# Altium PCB плата фотодетектора.PcbDoc
Units mm, origin at the board's own origin, x right, y up, seen from the top; angles counter-clockwise.
Board outline 50 x 50 mm, 4 copper layers (Top Layer, Inner 1, Inner 2, Bottom Layer), stack 0.778 mm thick; 82 components, 57 nets, 282 pads, 48 vias.
Unrouted connection lines stored in the file: 27.
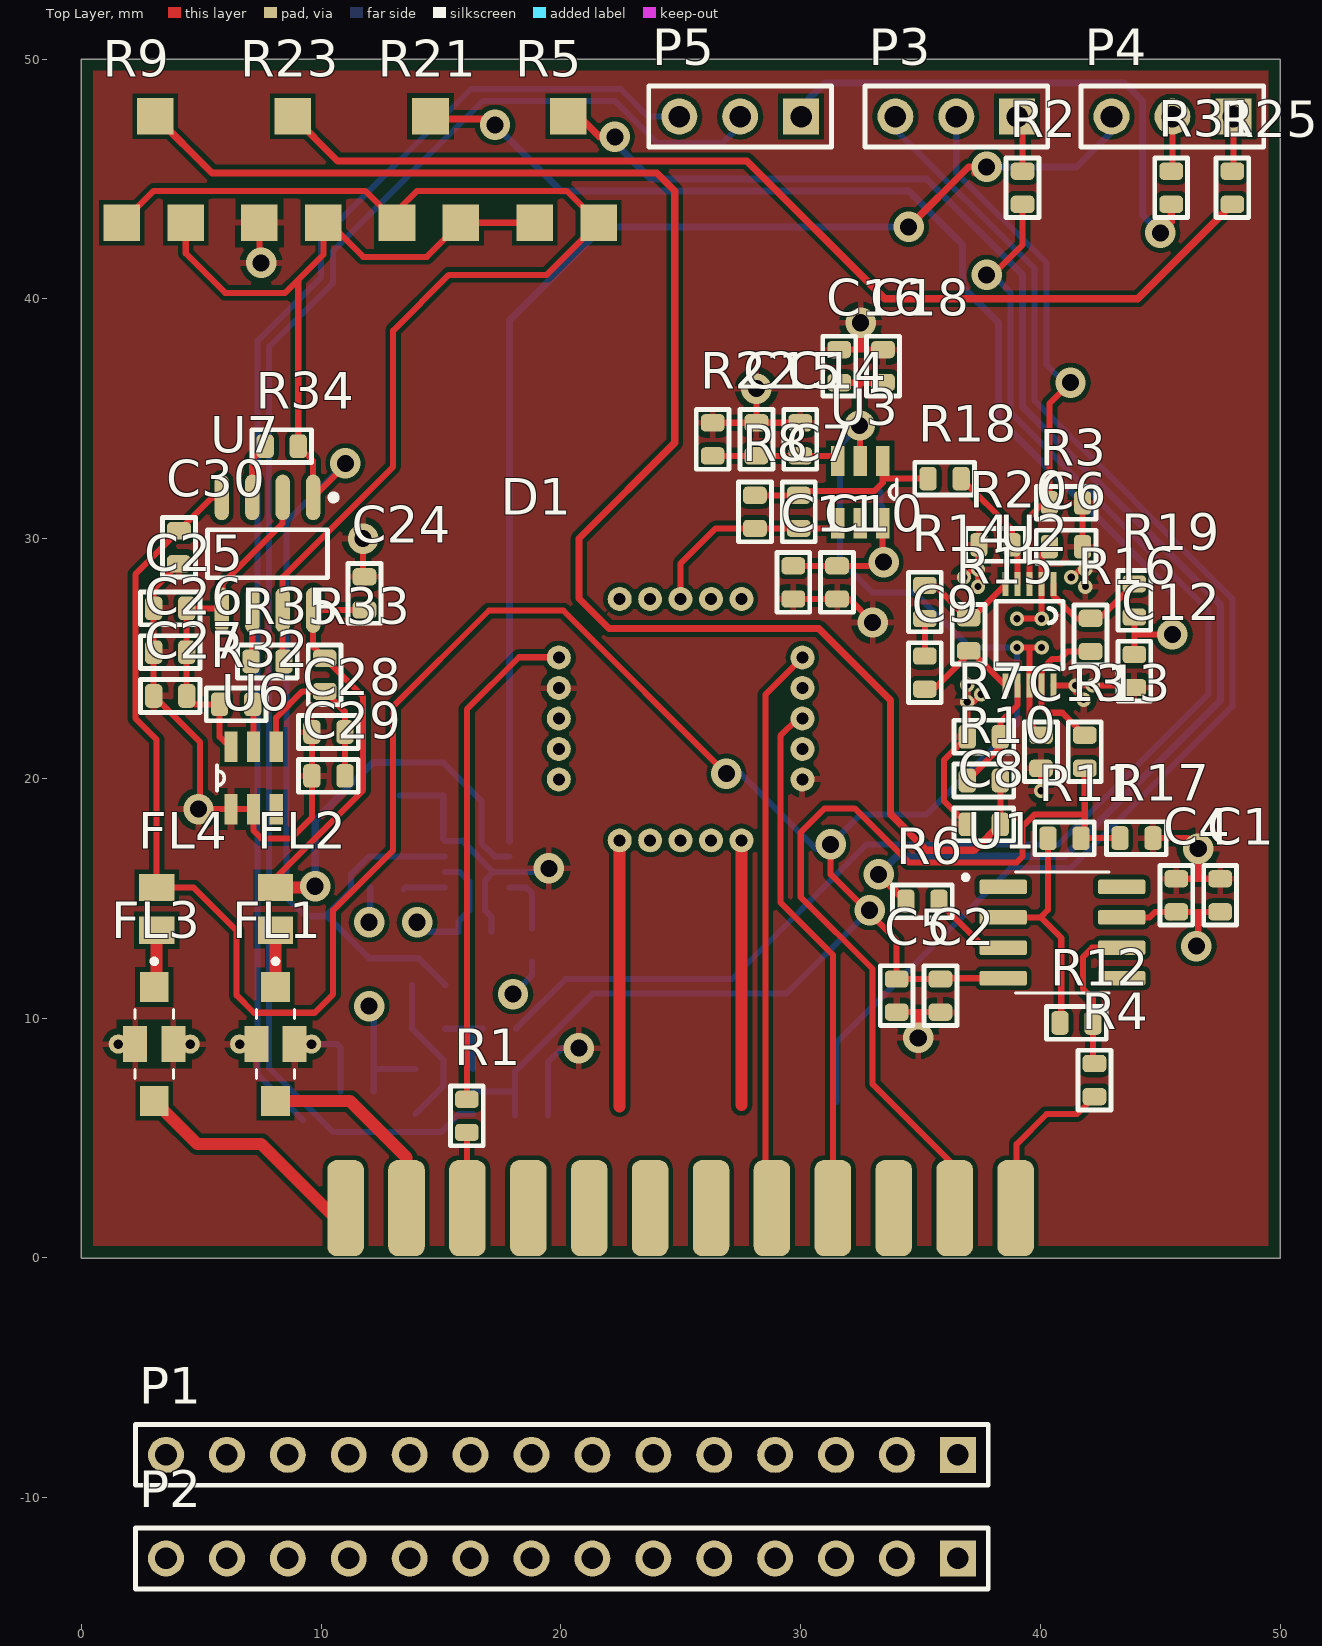
[diagram p0: Top Layer view]
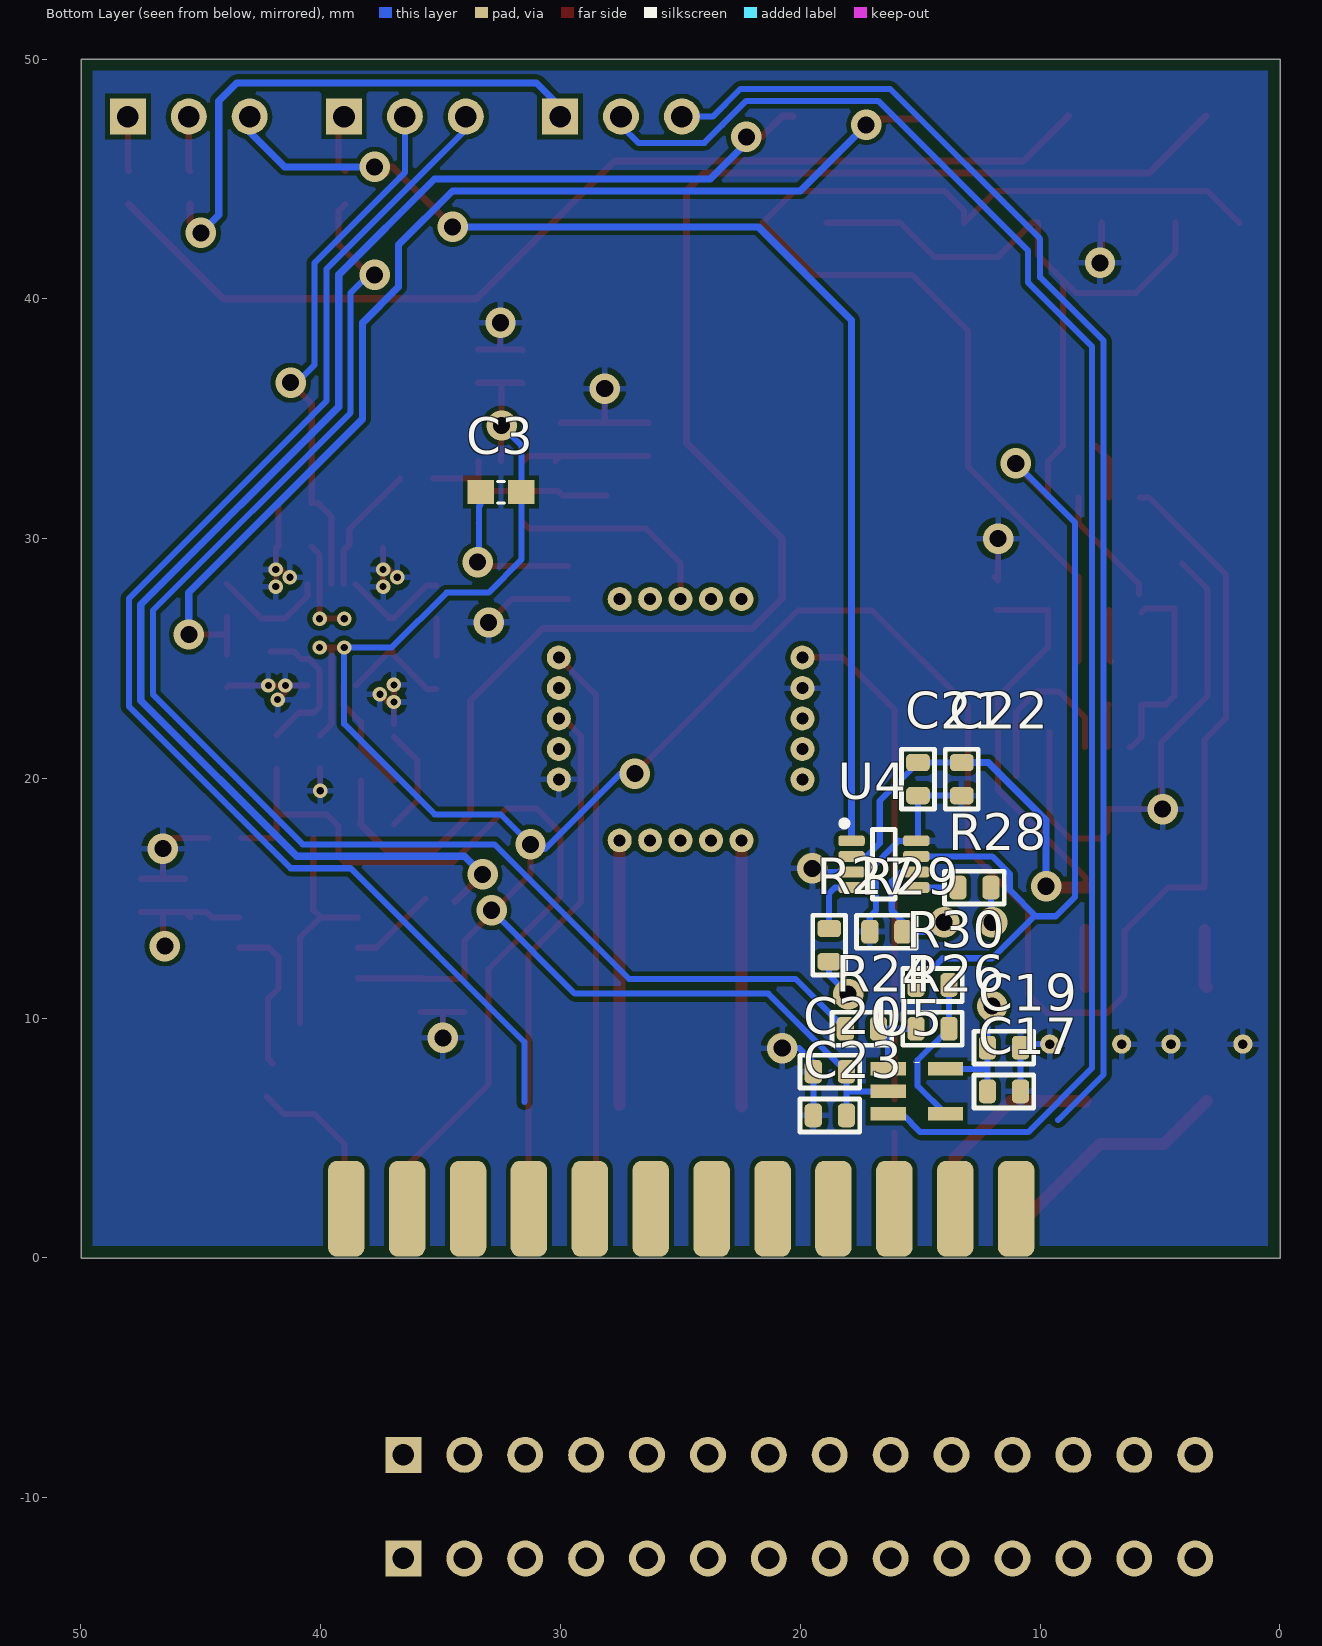
[diagram p1: Bottom Layer view, seen from below]
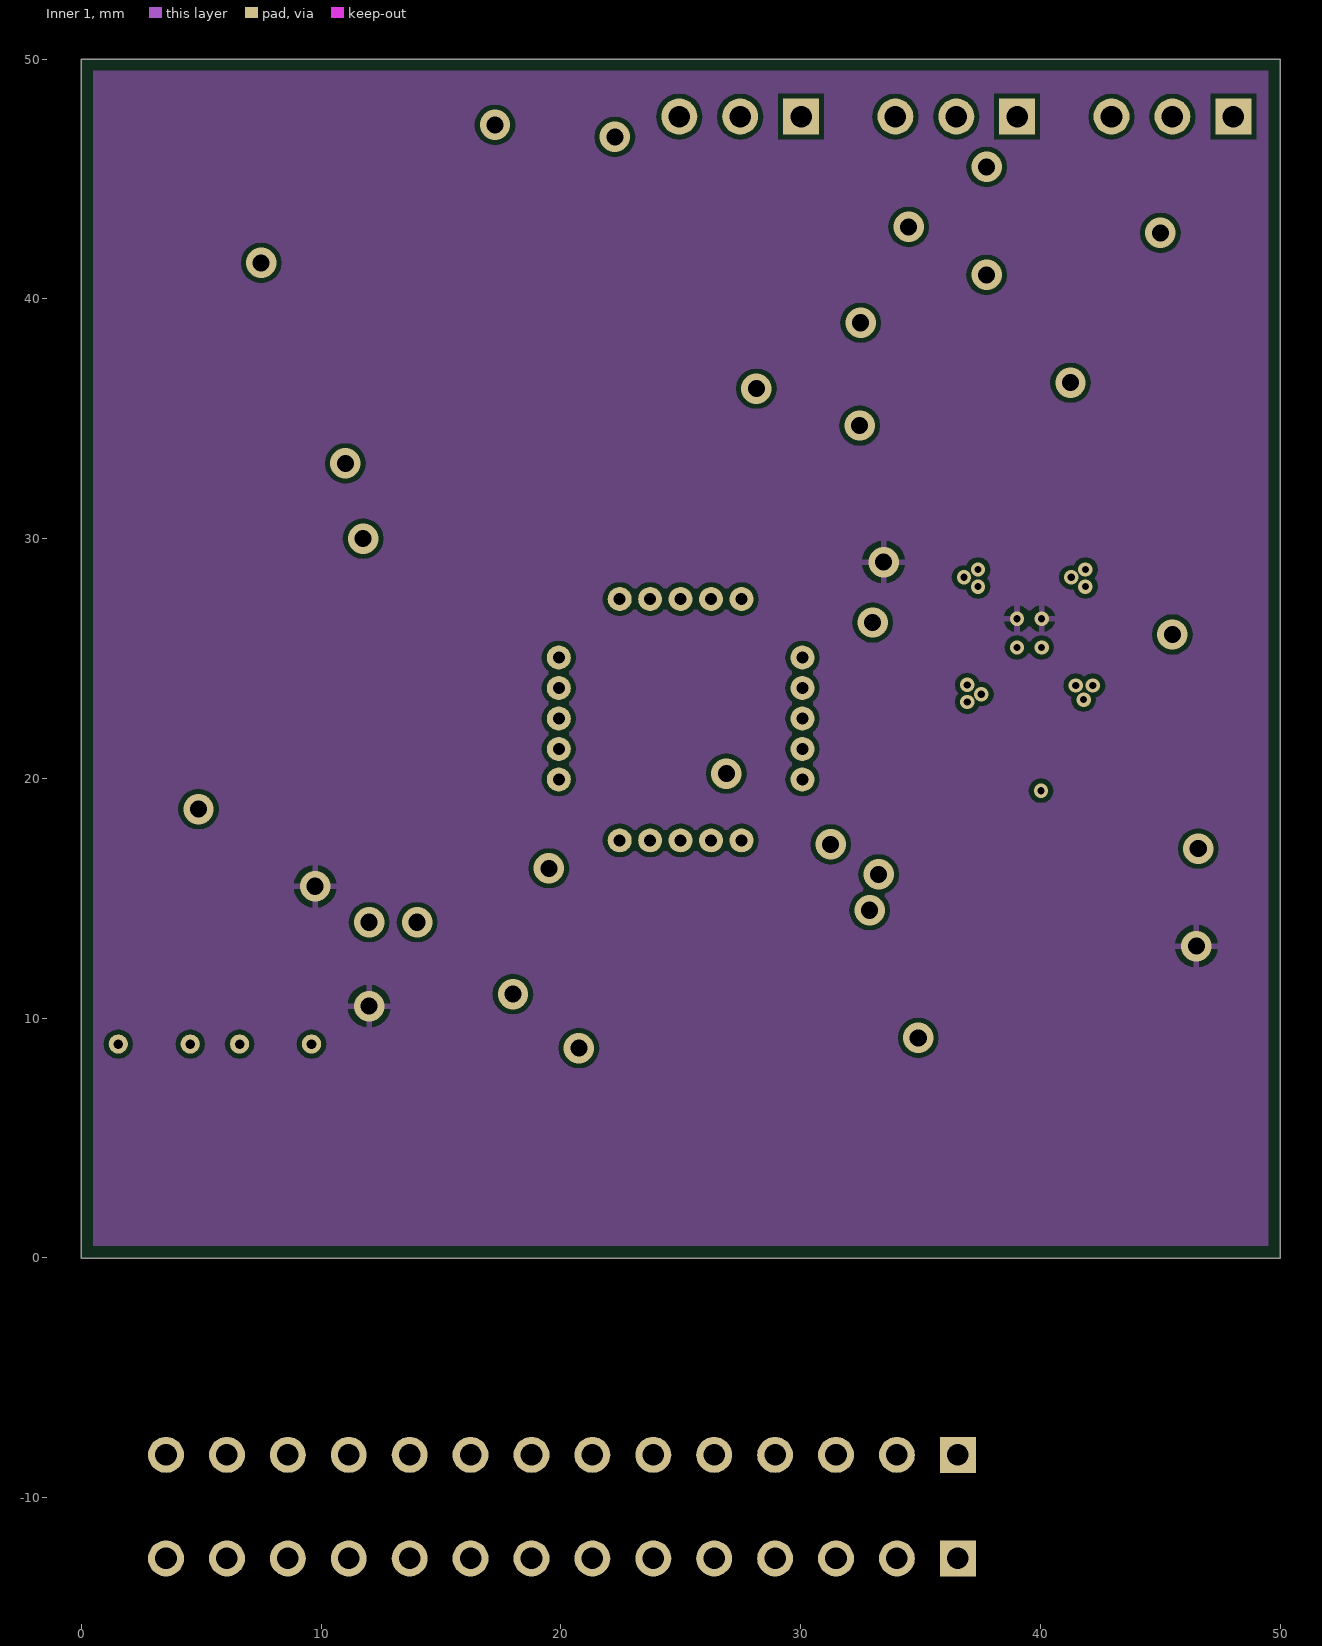
[diagram p2: Inner 1]
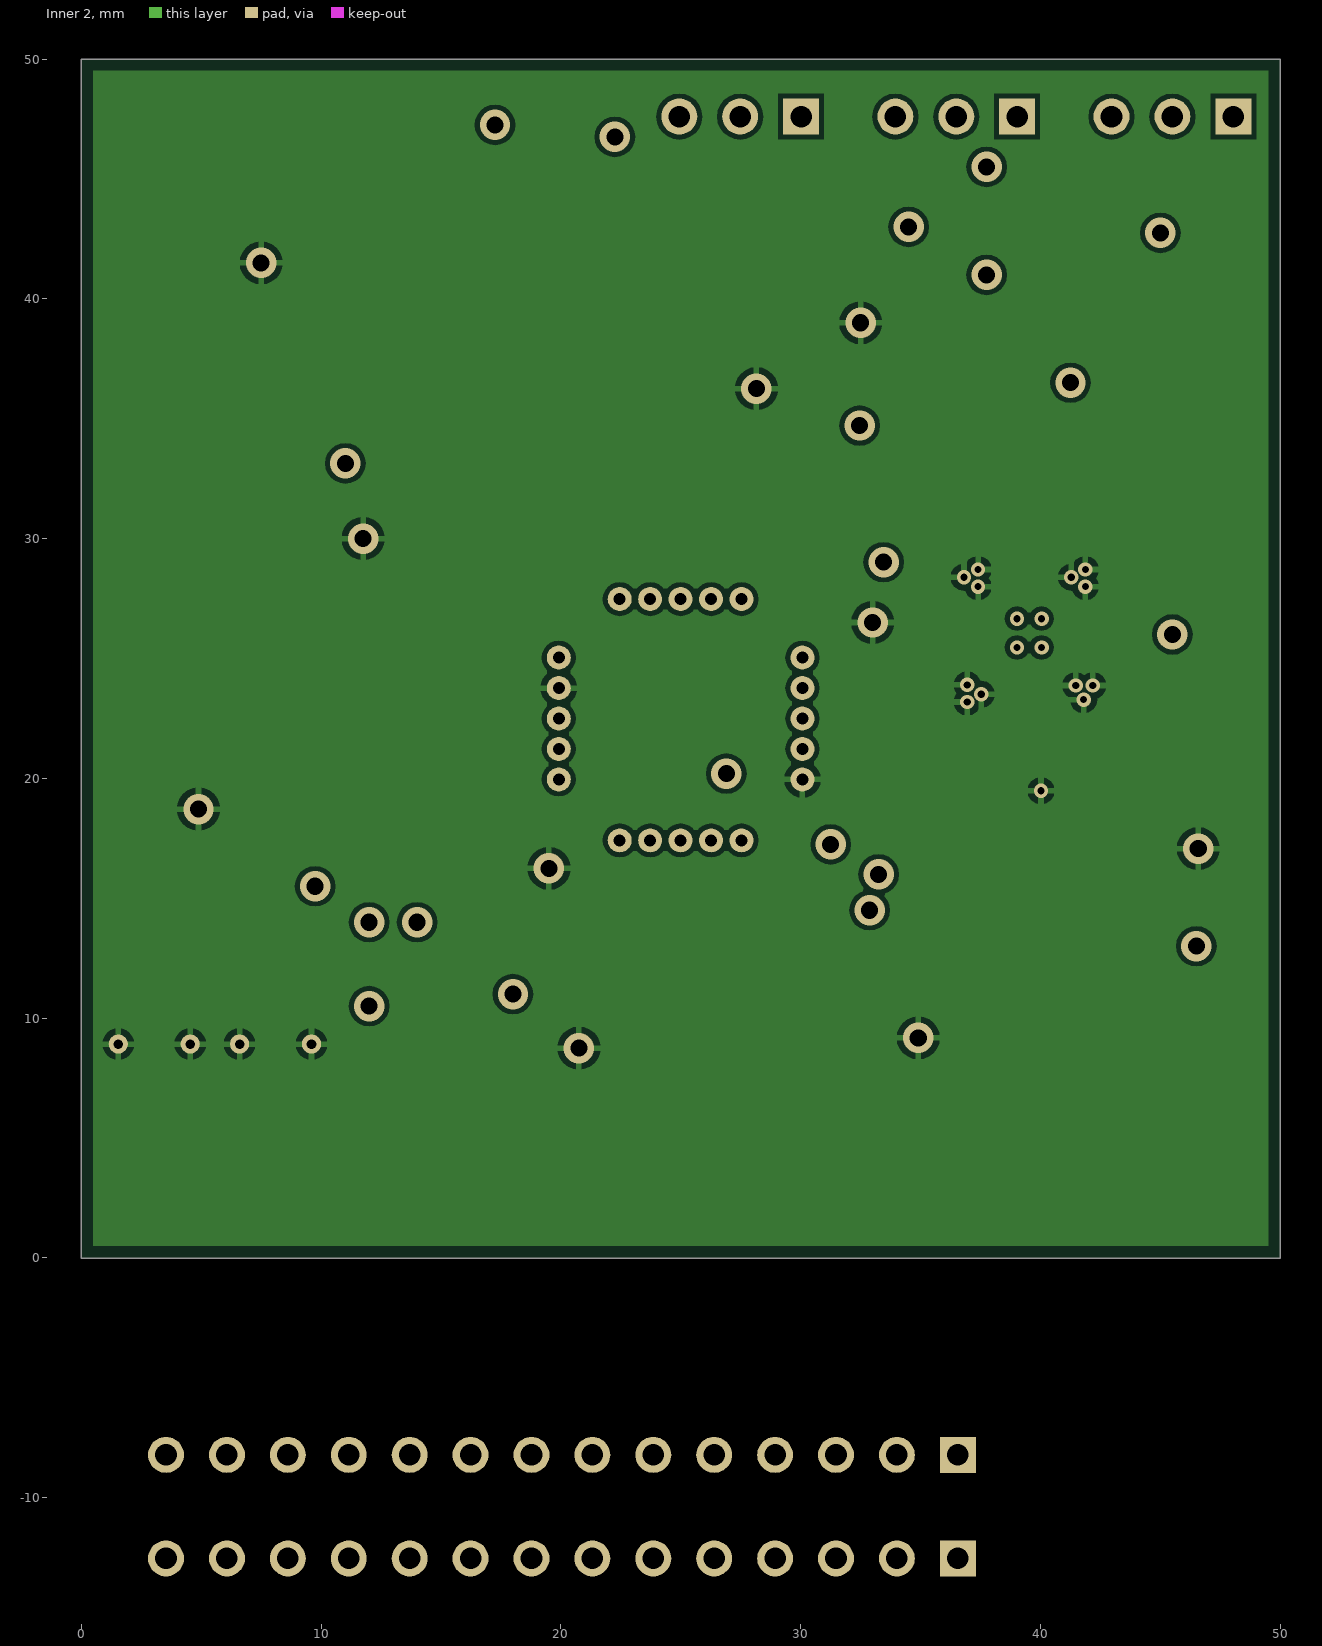
[diagram p3: Inner 2]
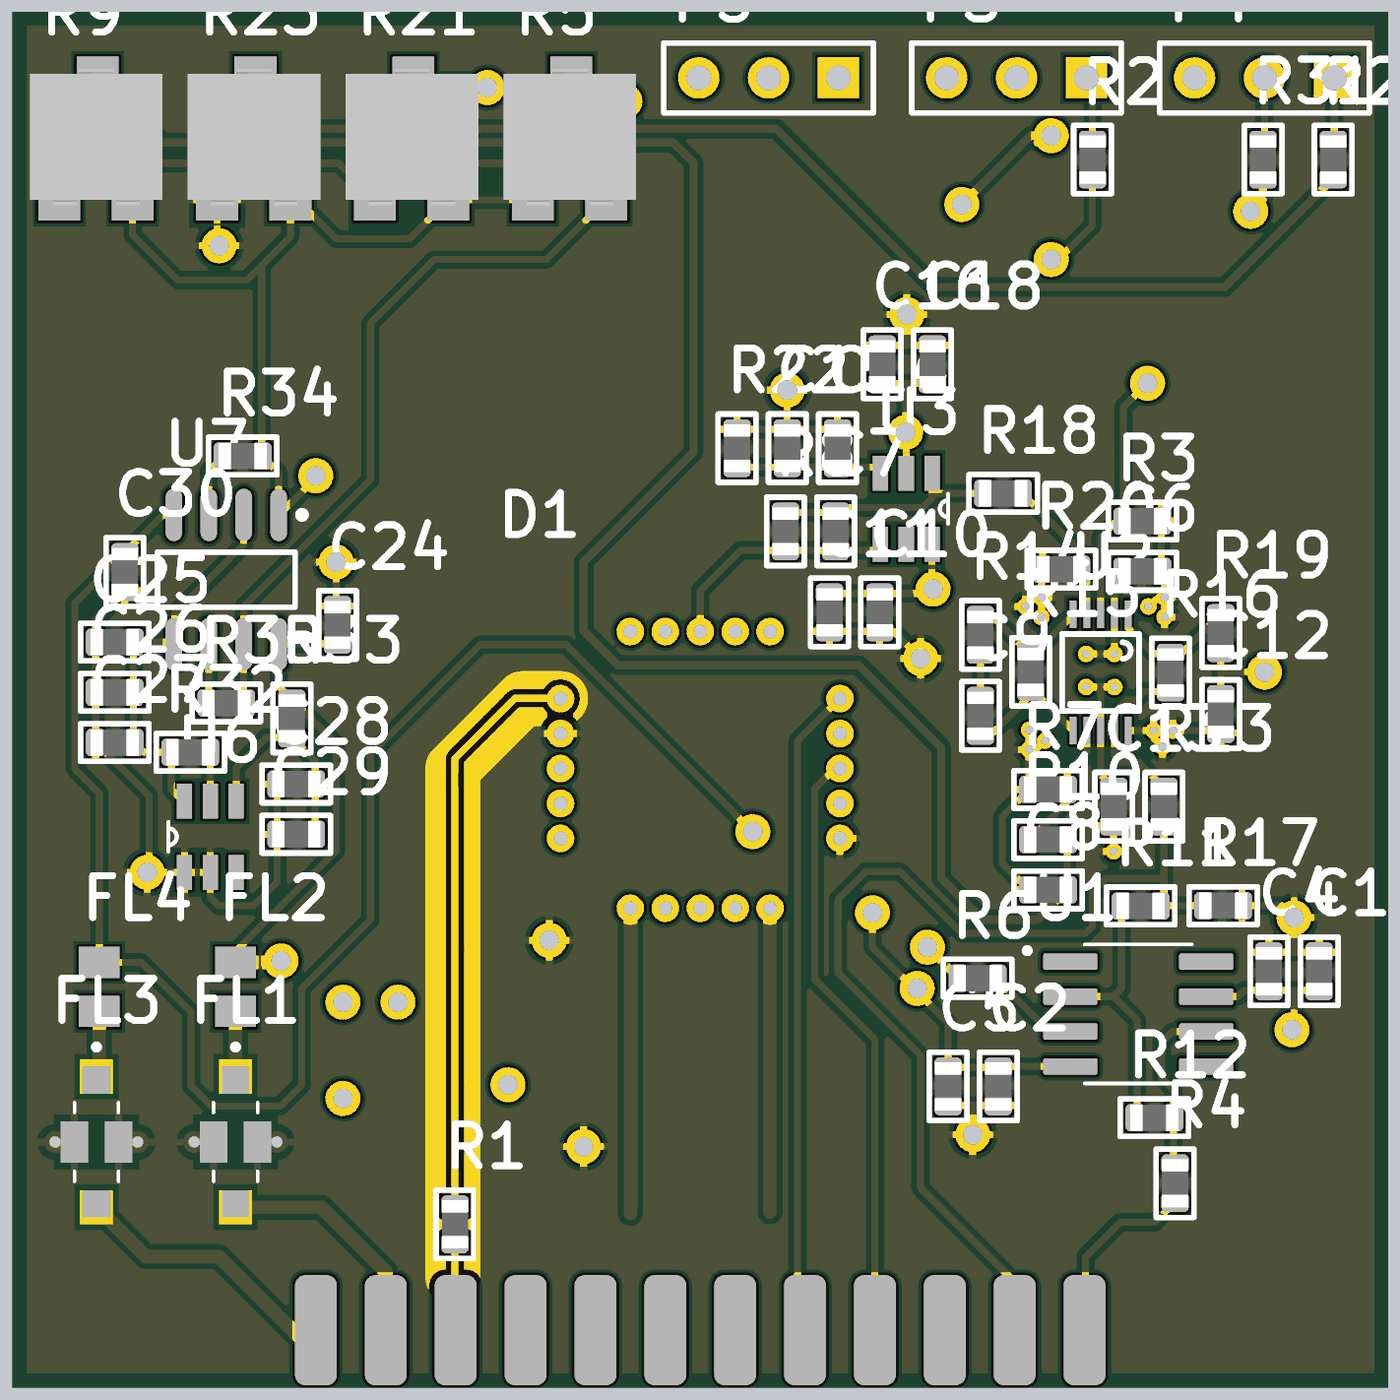
[diagram p4: 3D render of the assembled board from above, using the file's embedded part models]
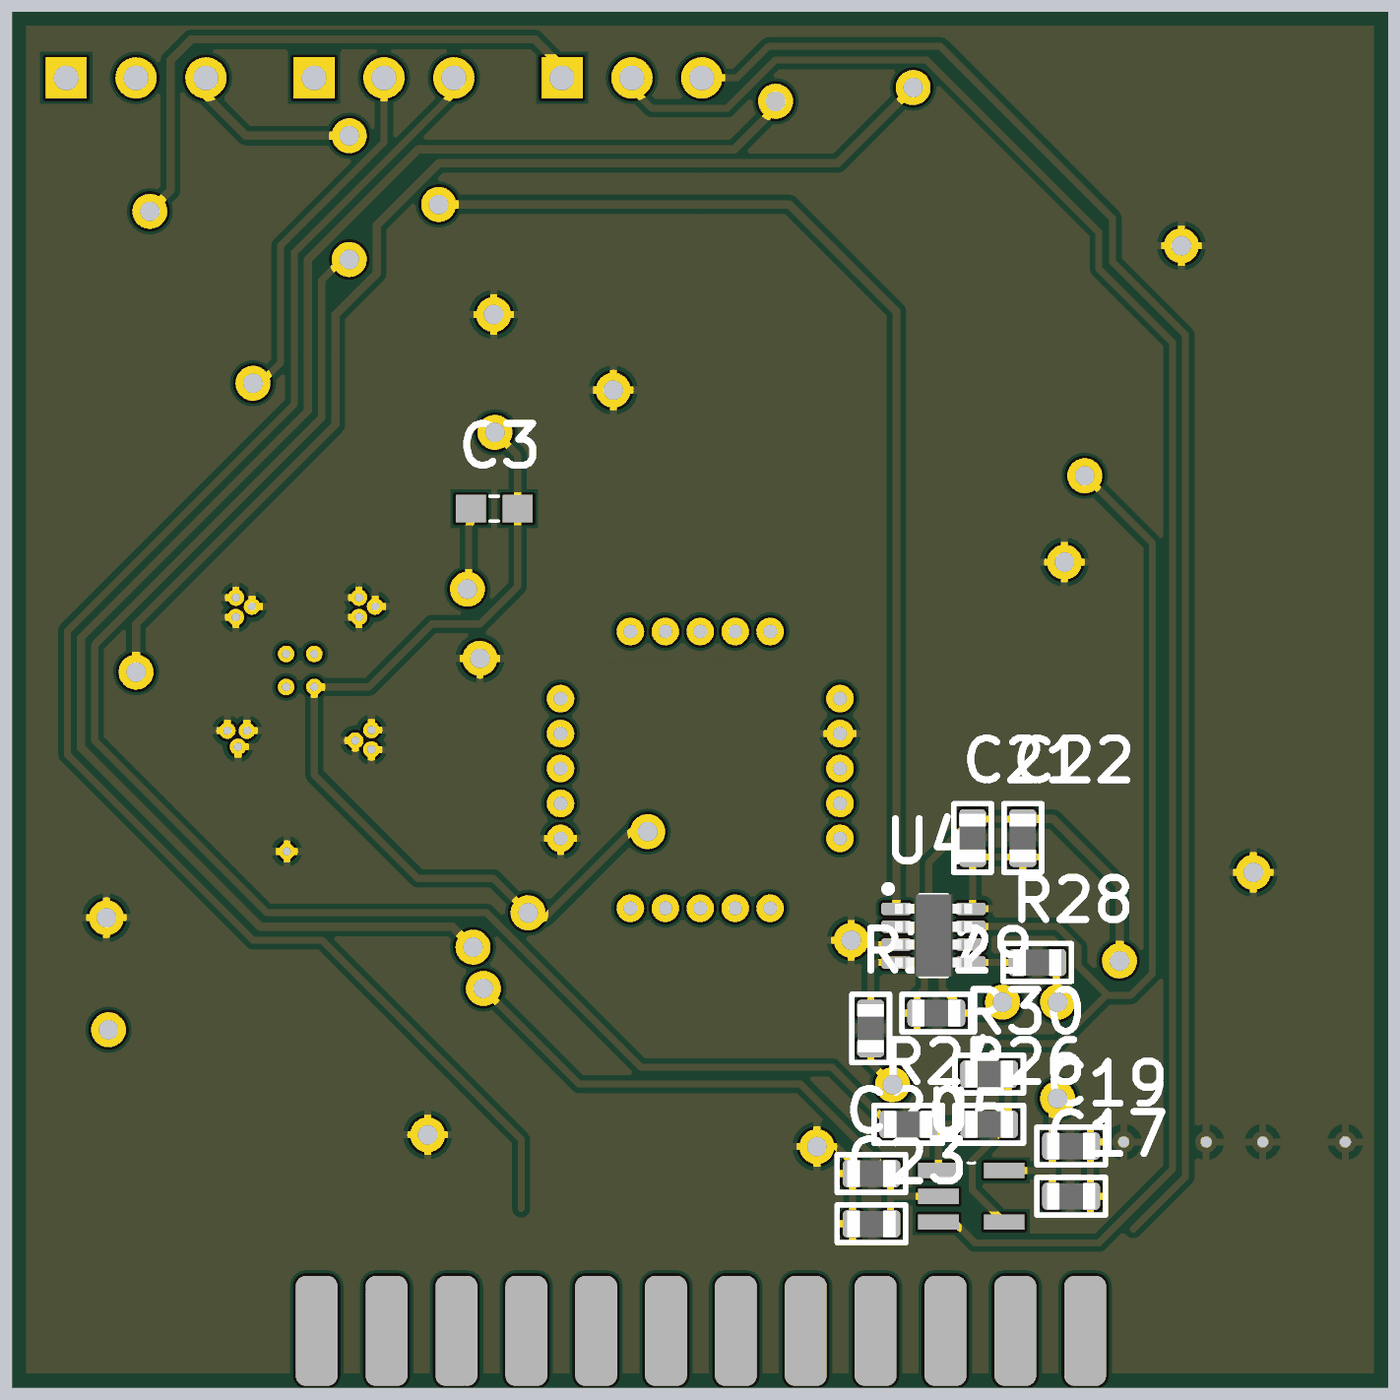
[diagram p5: 3D render of the assembled board from below, using the file's embedded part models]

## Layer stack, top to bottom
Top Solder: solder mask 0.0102, Solder Resist, Dk 3.5
Top Layer: signal copper 0.0356
Dielectric 1: core 0.254, FR-4, Dk 4.2
Inner 1: signal copper 0.036
Dielectric 3: prepreg 0.127, Dk 4.2
Inner 2: signal copper 0.036
Dielectric 2: core 0.254, Dk 4.2
Bottom Layer: signal copper 0.0356
Bottom Solder: solder mask 0.0102, Solder Resist, Dk 3.5

## Board outline
-0.01,-0.005 49.99,-0.005 49.99,49.995 -0.01,49.995

## Design rules (kind name [scope] priority, off if disabled: settings)
Clearance [All] p1: gap=0.2
PolygonConnect [All] p1: connectstyle=Relief reliefconductorwidth=0.254 reliefentries=4 polygonreliefangle="90 Angle" airgapwidth=0.254
RoutingVias [All] p1: holewidth=0.711 width=1.27 viastyle="Through Hole" minholewidth=0.711 minwidth=1.27 maxholewidth=0.711 maxwidth=1.27
SolderMaskExpansion [All] p1: expansion=0.102
Width [All] p1: maxlimit=254 minlimit=0.254 preferedwidth=0.254
30 further rules are at their usual default settings.

## Components (designator, comment, footprint, x,y, rotation, side; value= is the part's Value field where it differs from the comment)
C1 "6,8uF" 0603 47.49,15.124 r90 top
C2 "6,8uF" 0603 35.826,10.94 r90 top
C3 "CX0603MRX7R6BB104" CAPC1608X90 32.48,31.94 r0 bottom
C4 "0,1uF" 0603 45.664,15.124 r90 top
C5 "o,1uF" 0603 34,10.94 r90 top
C6 "2,2u" 0603 41.063,29.664 r0 top
C7 "0.5p" 0603 29.916,31.115 r270 top
C8 "100n" 0603 37.635,18.083 r180 top
C9 "15p" 0603 35.177,24.412 r90 top
C10 "6,8uF" 0603 31.516,28.172 r270 top
C11 "100n" 0603 29.69,28.172 r90 top
C12 "100n" 0603 43.913,24.475 r90 top
C13 "2,2u" 0603 40.02,21.11 r90 top
C14 "100n" 0603 29.979,34.14 r270 top
C15 "100p" 0603 28.153,34.14 r90 top
C16 "100n" 0603 31.606,37.19 r270 top
C17 "4,7uF" 0603 11.504,6.945 r0 bottom
C18 "6,6uF" 0603 33.432,37.19 r90 top
C19 "100n" 0603 11.504,8.771 r0 bottom
C20 "100n" 0603 18.766,7.77 r180 bottom
C21 "100n" 0603 15.09,19.969 r90 bottom
C22 "10u" 0603 13.264,19.969 r90 bottom
C23 "4,7uF" 0603 18.766,5.944 r180 bottom
C24 "100n" 0603 11.805,27.715 r270 top
C25 "100n" 0603 3.705,27.09 r0 top
C26 "1u" 0603 3.705,25.264 r0 top
C27 "1u" 0603 3.705,23.438 r0 top
C28 "100n" 0603 10.303,21.931 r0 top
C29 "2,2u" 0603 10.303,20.106 r0 top
C30 "100n" 0603 4.07,29.64 r90 top
D1 "C30956" C30659 24.99,22.495 r0 top
FL1 "NFM41PC155B1E3L" FIL_NFM41PC155B1E3L 8.097,8.92 r270 top
FL2 "BLM18SG700TN1D" BEADC2012X105N 8.097,14.557 r90 top
FL3 "NFM41PC155B1E3L" FIL_NFM41PC155B1E3L 3.04,8.92 r270 top
FL4 "BLM18SG700TN1D" BEADC2012X105N 3.14,14.557 r90 top
P1 "Header 14" HDR1X14 36.551,-8.213 r180 top
P2 "Header 14" HDR1X14 36.551,-12.531 r180 top
P3 "MHDR1X3" HDR1X3 39.028,47.6 r180 top
P4 "MHDR1X3" HDR1X3 48.04,47.6 r180 top
P5 "Header 3" HDR1X3 30.015,47.6 r180 top
R1 "CHV1206" 0603 16.075,5.925 r90 top
R2 "1k" 0603 39.25,44.631 r270 top
R3 "50" 0603 41.063,31.49 r0 top
R4 "50" 0603 42.25,7.418 r270 top
R5 "10k" respotBourns 16.87,42.535 r0 top
R6 "20k" 0603 35.076,14.873 r0 top
R7 "50" 0603 37.635,21.735 r180 top
R8 "10k" 0603 28.09,31.115 r90 top
R9 "10k" respotBourns -0.345,42.535 r0 top
R10 "1k" 0603 37.635,19.909 r180 top
R11 "400" 0603 41,17.5 r180 top
R12 "400" 0603 41.5,9.802 r0 top
R13 "50" 0603 41.846,21.11 r270 top
R14 "500" 0603 35.177,27.355 r270 top
R15 "500" 0603 37.003,26.01 r270 top
R16 "500" 0603 42.087,25.985 r270 top
R17 "50" 0603 44,17.509 r180 top
R18 "50" 0603 36,32.5 r0 top
R19 "4k" 0603 43.913,27.419 r90 top
R20 "50" 0603 38.12,29.74 r0 top
R21 "10k" respotBourns 11.132,42.535 r0 top
R22 "10k" 0603 26.327,34.14 r90 top
R23 "10k" respotBourns 5.394,42.535 r0 top
R24 "50" 0603 17.428,9.56 r0 bottom
R25 "1k" 0603 48,44.631 r270 top
R26 "10k" 0603 14.485,9.56 r0 bottom
R27 "50-300" 0603 18.795,13.046 r270 bottom
R28 "50-300" 0603 12.736,15.445 r180 bottom
R29 "5k" 0603 16.41,13.605 r180 bottom
R30 "10k" 0603 14.485,11.386 r180 bottom
R31 "10k" 0603 45.45,44.631 r90 top
R32 "1k" 0603 6.455,23.087 r180 top
R33 "1kom" 0603 10.145,24.316 r90 top
R34 "1kom" 0603 8.355,33.855 r180 top
R35 "1kom" 0603 7.76,24.875 r180 top
U1 "OPA656U" SOIC127P599X175-8N 40.915,13.57 r0 top
U2 "VCA824" MSOP10 39.545,25.985 r180 top
U3 "OPA847IDBVT" *SOT95P280X145-6N 32.48,31.94 r270 top
U4 "CAT5172" SOT238 16.51,16.42 r180 bottom
U5 "AD8065ART-R2" SOT95P290X145-5N 15.135,6.945 r180 bottom
U6 "REF3225AMDBVREPG4" SOT95P280X145-6N 7.18,20.015 r90 top
U7 "LM2904D" SO8_L 7.76,29.365 r270 top

## Footprints (in the part's own frame and the unit in brackets; to place one, negate y for a bottom-side part, rotate by r counter-clockwise, add the part's x,y. Pads: shape width x height; smd on the part's side, far side on the other; paste and mask are expansions set on the pad)
0603 [mm]
  rrect50% 0.72x0.99 smd: 1(-0.69,0) 2(0.69,0)
  silkscreen extent -1.24,-0.69 1.24,0.69, body extent -0.87,-0.47 0.88,0.48, height 0.5
*SOT95P280X145-6N [mil]
  rect 50x22 smd: 1(-51,37) 2(-51,0) 3(-51,-37) 4(51,-37) 5(51,0) 6(51,37)
  silkscreen extent -21,48 21,60
BEADC2012X105N [mm]
  rect 1.14x1.47 smd: 1(-0.89,0) 2(0.89,0)
C30659 [mm]
  round 1 hole 0.5 paste+0: 1(-2.54,4.98) 2(0,4.98) 3(2.54,4.98) 4(5.08,2.54) 5(5.08,0) 6(5.08,-2.54) 7(2.54,-5.08) 8(0,-5.08) 9(-2.54,-5.08) 10(-5.08,-2.54) 11(-5.08,0) 12(-5.08,2.54)
  body extent -7.62,-7.62 7.62,7.62, height 5.6
CAPC1608X90 [mm]
  rect 1.1x1 smd: 1(-0.85,0) 2(0.85,0)
  silkscreen extent -0.15,-0.45 0.15,0.45
FIL_NFM41PC155B1E3L [mm]
  rect 1.25x1.2 smd paste-2 mask+0: 1(-2.375,0) 3(2.375,0)
  rect 1.5x1 smd mask+0: 2(0,0.8) 2_1(0,-0.8)
  round 0.8 hole 0.4 mask+0: 2_3(0,1.5) 2_4(0,-1.5)
  silkscreen extent -3.55,-0.8 1.43,0.8
HDR1X3 [mm] "Connector; Header; 3 Position"
  rect 1.5x1.5 hole 0.9: 1(0,0)
  round 1.5 hole 0.9: 2(2.54,0) 3(5.08,0)
  silkscreen extent -1.27,-1.27 6.35,1.27
HDR1X14 [mm] "Connector; Header; 14 Position"
  rect 1.5x1.5 hole 0.9: 1(0,0)
  round 1.5 hole 0.9: 2(2.54,0) 3(5.08,0) 4(7.62,0) 5(10.16,0) 6(12.7,0) 7(15.24,0) 8(17.78,0) 9(20.32,0) 10(22.86,0) 11(25.4,0) 12(27.94,0) 13(30.48,0) 14(33.02,0)
  silkscreen extent -1.27,-1.27 34.29,1.27
MSOP10 [mm]
  rect 0.25x1 smd: 1(-1,-2.113) 2(-0.5,-2.113) 3(0,-2.113) 4(0.5,-2.113) 5(1,-2.113) 6(1,2.113) 7(0.5,2.113) 8(0,2.113) 9(-0.5,2.113) 10(-1,2.113)
  silkscreen extent -1.4,-1.4 1.4,1.4
respotBourns [mil]
  rect 60x60 smd: 1(80,25) 2(135,200) 3(185,25)
  body extent 38,18 228,213, height 147
SO8_L [mm] "SOIC, 8-Leads, Body 4.9x3.9mm, Pitch 1.27mm, IPC High Density"
  oval 1.9x0.6 smd: 1(-2.35,1.905) 2(-2.35,0.635) 3(-2.35,-0.635) 4(-2.35,-1.905) 5(2.35,-1.905) 6(2.35,-0.635) 7(2.35,0.635) 8(2.35,1.905)
  silkscreen extent -2.47,-2.5 1,2.88, body extent -1.95,-2.45 1.95,2.45, height 1.75
SOIC127P599X175-8N [mm]
  rrect25% 1.97x0.6 smd: 1(-2.47,1.905) 2(-2.47,0.635) 3(-2.47,-0.635) 4(-2.47,-1.905) 5(2.47,-1.905) 6(2.47,-0.635) 7(2.47,0.635) 8(2.47,1.905)
  silkscreen extent -4.14,-2.52 1.95,2.52
SOT95P280X145-6N [mil]
  rect 50x22 smd: 1(-51,37) 2(-51,0) 3(-51,-37) 4(51,-37) 5(51,0) 6(51,37)
  silkscreen extent -21,48 21,60
SOT95P290X145-5N [mil]
  rect 58x22 smd: 1(-47,37) 2(-47,0) 3(-47,-37) 4(47,-37) 5(47,37)
  silkscreen extent -5,47 5,48
SOT238 [mm]
  rrect50% 1.1x0.45 smd: 1(-1.35,0.975) 2(-1.35,0.325) 3(-1.35,-0.325) 4(-1.35,-0.975) 5(1.35,-0.975) 6(1.35,-0.325) 7(1.35,0.325) 8(1.35,0.975)
  silkscreen extent -1.78,-1.45 0.48,1.82, body extent -1.4,-1.5 1.4,1.5, height 1

## Part data
C1 C2 C4 C5 C6 C7 C8 C9 C10 C11 C12 C13 C14 C15 C16 C17 C18 C19 C20 C21 C22 C23 C24 C25 C26 C27 C28 C29 C30: library part _capacitor
C3: "0.1AµF A±20% 10V Ceramic Capacitor X7R 0603 (1608 Metric)"
D1: "ADP_Diod"
FL1 FL3: "?s???????µ??N??°N‚??N€ SMD N? ?µ??????N?N‚N?NZ: 1.5 ???s?¤ ?????». 20%. ???????????°?»N??????µ ???°??N€N??¶?µ?????µ: 25Vdc"
FL2 FL4: library part BLM21SP111SN1D, "110 ???? @ 100 ???“N† 1 ?»??????N? N??»?µ??N‚N€?????µN€?µ???°N‡ N„?µN€N€??N‚????N‹?? N??°N€???? 0805 (2012 ???µN‚N€?????°) 5A"
P1 P2: "Header, 14-Pin"
P3 P4 P5: "Header, 3-Pin"
R1 R2 R3 R4 R6 R7 R8 R10 R11 R12 R13 R14 R15 R16 R17 R18 R19 R20 R22 R24 R25 R26 R27 R28 R29 R30 R31 R32 R33 R34 R35: library part _resistor
R5 R9 R21: library part _resistor_pot, "3224J-1-103"
R23: library part _resistor_pot, "3224j-1-103"
U1: "Wideband, Unity Gain Stable FET-Input Operational Amplifier"
U4: "Digital potentiometr 256-position SPI"
U5: "??N????»??N‚?µ?»N? ???±N€?°N‚?????? N???N??·?? ???? ???°??N€N??¶?µ????NZ 1 N†?µ??N? N€?µ?»N?N?-N€?µ?»N?N? SOT-23-5"
U6: "?????µ?»??N‡?µ????N‹?? ??N€????N???N‚ 4 Ppm/Degreesc 100 UA Sot23-6 N??µN€??N? N???N€?°?????? ???°??N€N??¶?µ????N? N‚?????° 6-SOT-23 -55 ???? 125"
U7: "Low-Power Dual Operational Amplifier"

## Free pads (board coordinates)
  rrect50% 1.524x4 smd far side: 2(26.235,2.052) 3(23.695,2.052) 4(21.155,2.052) 5(18.615,2.052) 6(16.075,2.052) 7(13.535,2.052) 8(10.995,2.052) 9(28.775,2.052) 10(31.315,2.052) 11(33.855,2.052) 12(36.395,2.052) 13(38.935,2.052)
  rrect50% 1.524x4 smd: 2(26.26,2.078) 3(23.72,2.078) 4(21.18,2.078) 5(18.64,2.078) 6(16.1,2.078) 7(13.56,2.078) 8(11.02,2.078) 9(28.8,2.078) 10(31.34,2.078) 11(33.88,2.078) 12(36.42,2.078) 13(38.96,2.078)
  round 1 hole 0.5: 14(19.91,21.225) 14(19.91,23.765) 14(23.72,17.415) 14(23.72,27.475) 14(26.26,17.415) 14(26.26,27.475) 14(30.07,21.225) 14(30.07,23.765)

## Via types
v1: diameter 1.27, hole 0.711, Top Layer to Bottom Layer, 31 vias
v2: diameter 0.6, hole 0.3, Top Layer to Bottom Layer, 17 vias

## Nets (pads, with @x,y where several pads share a name; then routed paths per layer and width w, separated by ;. In a path a pad name is that pad's centre, name@x,y a point inside that pad or via, vN(x,y) a via of type N, cw(c..) or ccw(c..) an arc to the next point about the centre after c; other vN are vias at no path point)
+2.5REF: R5.1 R9.3 R21.3 R23.3 R30.1 R34.1 U4.7 U7.1 | length 64.7
  Top Layer w0.254: R9.3 4.354,41.896 6,40.25 8.5,40.25 9,40.75 ; v1(11.013,33.138) 11.013,33.062 U7.1 9.665,33.235 R34.1 9.045,40.705 ; R5.1 R21.3 14.411,41.75 11.75,41.75 10.33,43.17 R23.3 10.093,41.843 9.045,40.795 ; 9,40.75 9.045,40.795 ; 9,40.75 9.045,40.705 ; 9.045,40.705 9.045,40.795
  Bottom Layer w0.254: v1(11.013,33.138) 8.55,30.675 8.55,15.05 9.35,14.25 10.175,14.25 ; U4.7 15.155,16.75 12,16.75 11.25,16 11.25,15.325 10.175,14.25 ; R30.1 14.061,12.5 12,12.5 10.25,14.25 10.175,14.25
+5V: FL1.3 P2.1 P2.2 pad.7@13.56,2.078 | length 8.6
  Top Layer w0.5: FL1.3@8.142,6.5 FL1.3 11.205,6.545 13.56,4.19 pad.7@13.56,2.078
+5V(AN): C1.1 C3.2 C4.1 C6.1 C10.1 C11.2 C17.2 C19.2 C21.2 C22.2 C24.2 FL2.2 P1.12 R33.2 U1.7 U2.2 U3.6 U4.2 U5.5 U7.8 | length 56.4
  Top Layer w0.254: FL2.2 8.097,15.847 11.75,19.5 11.75,23.401 R33.2 9.665,25.486 U7.8 9.675,27.025 C24.2 ; v1@9.697,15.447 v1(9.75,15.5) ; C11.2 C10.1 33.302,28.862 v1(33.455,29.015) 33.79,29.015 33.405,29.4 33.405,30.63 U3.6 ; v2(39.02,26.66) v2(40.045,26.66) ; v2@40.045,26.685 U2.2 40.045,29.335 C6.1 ; U1.7 44.55,14.205 44.779,14.434 C4.1 ; C4.1@45.435,14.205 C4.1 ; v1(46.5,13) 46.577,13.077 46.577,14.434 ; C1.1 46.577,14.434 ; C4.1 46.577,14.434
  Top Layer w0.5: FL2.2 v1@9.697,15.447
  Bottom Layer w0.254: v1(12,10.5) 12.194,10.306 C19.2 12.194,7.92 ; C17.2 12.194,7.92 ; C22.2 C21.2 16.685,19.064 16.685,17.295 17.235,16.745 U4.2 ; U5.5 12.229,7.885 12.194,7.92 ; C3.2 33.33,31.415 33.405,31.34 v1@33.405,29.315
  Bottom Layer w0.3: v1(9.75,15.5) 9.75,18.25 12.159,20.659 C22.2
-2.5REF: R5.3 R9.1 R21.1 R35.1 U7.7 | length 48.5
  Top Layer w0.254: R9.1 3.018,44.5 11.833,44.5 R21.1 13.164,43.664 14,44.5 20.238,44.5 R5.3 19.399,41 15.325,41 13,38.675 13,33 8.395,28.395 U7.7 8.395,24.905 R35.1@8.425,24.875
-5V: FL3.3 P2.4 P2.5 pad.8@11.02,2.078 | length 10.2
  Top Layer w0.5: FL3.3 4.835,4.75 7.5,4.75 pad.8@11,1.25
-5V(AN): C2.2 C3.1 C5.2 C13.2 C16.2 C18.1 C20.2 C23.2 C30.2 FL4.2 U1.4 U2.8 U3.2 U5.2 U7.4 | length 137.6
  Top Layer w0.254: U7.4 5.455,31.715 C30.2 2.25,28.51 2.25,22.5 3.14,21.61 FL4.2 4.678,15.447 6.475,13.65 6.475,10.95 7.2,10.225 9.725,10.225 10.5,11 10.5,14.5 13,17 13,23 17,27 20.1,27 v1(26.9,20.2) ; v1(31.25,17.25) 31.25,16 34,13.25 C5.2 C2.2 C2.2@35.382,11.63 ; C16.2@31.581,36.475 C16.2 C18.1 ; 32.455,36.4 v1(32.455,34.715) 32.48,34.69 U3.2 ; C2.2@35.766,11.665 U1.4 ; v2(39.02,25.46) 39.545,25.46 ; C13.2 39.545,22.275 U2.8 39.545,25.46 ; v2(40.045,25.46) 39.545,25.46
  Bottom Layer w0.254: U5.2 18.051,6.945 18.076,6.97 ; C23.2 18.076,6.97 ; v1(26.9,20.2) 27.5,20.2 30.65,17.05 31.05,17.05 v1(31.25,17.25) 32.5,18.5 35.25,18.5 39.02,22.27 v2(39.02,25.46) 37.04,25.46 34.75,27.75 33,27.75 31.63,29.12 C3.1 31.63,33.89 v1(32.455,34.715) ; v1(32.875,14.5) 29.4,11.025 21.331,11.025 C20.2 18.076,6.97
ANODE_APD: C7.2 D1.2 R8.1 U3.4 | length 8.7
  Top Layer w0.254: D1.2 24.99,28.965 26.45,30.425 R8.1 C7.2 31.321,30.425 U3.4
CATHODE_APD: D1.12 R1.2 | length 21
  Top Layer w0.254: R1.2 16.075,22.875 18.25,25.05 19.895,25.05 D1.12
GND: C1.2 C2.1 C4.2 C5.1 C6.2 C8.2 C10.2 C11.1 C12.1 C13.1 C14.1 C15.2 C16.1 C17.1 C18.2 C19.1 C20.1 C21.1 C22.1 C23.1 C24.1 C25.1 C26.1 C27.1 C28.1 C29.1 C30.1 D1.6 FL1.2 FL1.2_1 FL1.2_3 FL1.2_4 FL3.2 FL3.2_1 FL3.2_3 FL3.2_4 P1.11 P2.3 P2.6 P2.9 P2.12 pad.14@19.91,23.765 R3.2 R7.2 R17.1 R20.1 R22.2 R23.1 R29.1 U2.10 U4.3 U4.8 U6.1 U6.2 | length 82
  Top Layer w0.254: C30.1 3.015,27.895 C25.1 C26.1 C27.1 4.953,21.5 4.953,18.788 v1(4.885,18.72) U6.1 U6.2 7.18,17.82 7.5,17.5 8.75,17.5 9.613,18.363 C29.1 C28.1 ; R23.1 7.426,41.574 v1(7.5,41.5) ; v1(11.75,30) 11.75,28.25 11.905,28.405 C24.1 ; R22.2 C15.2 ; v1@28.25,36.5 28.153,36.403 v1(28.153,36.25) C15.2 ; C11.1 C10.2@31.742,27.482 ; C14.1 C15.2 ; C10.2 32.018,27.482 v1(33,26.5) ; C16.1@31.581,37.855 C16.1 32.519,37.88 ; v1(32.5,39) 32.519,38.981 32.519,37.88 ; C18.2 32.519,37.88 ; C5.1 34.902,10.25 ; v1(34.902,9.179) 34.902,10.25 ; C2.1 34.902,10.25 ; v2(36.808,28.385) 37.133,28.71 v2(37.395,28.71) ; 36.945,22.26 v2(36.945,23.185) ; v2(36.945,23.897) v2(36.945,23.185) ; C8.2 35.97,19.059 35.97,20.76 R7.2 ; v2(37.395,27.998) v2(37.395,28.71) ; R20.1@37.395,29.635 v2(37.395,28.71) ; v2(37.532,23.51) 37.207,23.185 v2(36.945,23.185) ; v2(40.02,19.485) C13.1 ; U2.10 v2(41.47,23.872) ; v2@41.308,28.385 41.633,28.71 v2(41.87,28.71) C6.2@41.87,29.635 ; C6.2 R3.2 ; v2(41.795,23.285) 41.47,23.61 v2(41.47,23.872) ; v2(41.87,27.998) 41.87,28.685 v2@41.895,28.71 ; C12.1 43.826,23.872 v2(42.182,23.872) v2(41.47,23.872) ; R17.1 46.139,17.509 v1(46.577,17.07) 46.577,15.814 ; C4.2 46.577,15.814 ; C1.2 46.577,15.814
  Bottom Layer w0.254: FL1.2_3 10.665,8.92 C19.1 C17.1 ; C22.1 C21.1 15.09,17.465 U4.8 15.885,17.395 ; 15.895,17.405 15.885,17.395 ; R29.1 17.1,14.23 16.835,14.495 16.835,15.745 17.185,16.095 ; C23.1 C20.1 19.456,8.162 20.044,8.75 v1(20.75,8.75) ; v1(19.5,16.25) 19.345,16.095 U4.3 17.185,16.095 ; 15.885,17.395 17.185,16.095
  other v2: 41.283,28.385
INPUT+HV: P2.13 pad.6@16.1,2.078 R1.1 | length 3.2
  Top Layer w0.254: R1.1 16.075,2.103 pad.6@16.1,2.078
NetC7_1: C7.1 R8.2 R18.1 U3.1 | length 8.3
  Top Layer w0.254: R8.2 C7.1 30.091,31.98 33.07,31.98 33.42,32.33 33.42,32.5 ; U3.1 33.42,32.5 ; R18.1 33.42,32.5
NetC8_1: C8.1 R9.2 R10.1 | length 68.6
  Top Layer w0.254: C8.1 R10.1
  Top Layer w0.3: R9.2 5.449,45.25 24,45.25 24.75,44.5 24.75,34 20.75,30 20.75,27.5 22,26.25 30.75,26.25 33.75,23.25 33.75,18.5 35.25,17 37.242,17 C8.1
NetC9_1: C9.1 R15.2 U2.6 | length 4.7
  Top Layer w0.254: C9.1 35.557,23.722 37.003,25.168 R15.2 37.097,25.32 U2.6
NetC9_2: C9.2 R14.2 | length 1.6
  Top Layer w0.254: C9.2 R14.2
NetC12_2: C12.2 R19.1 R21.2 | length 46.8
  Top Layer w0.254: C12.2 43.913,26 ; R19.1 43.913,26 ; v1(45.5,26) 43.913,26
  Top Layer w0.3: R21.2@15.121,47.5 17,47.5 v1(17.25,47.25)
  Bottom Layer w0.3: v1(17.25,47.25) 20,44.5 34.5,44.5 36.75,42.25 36.75,40.5 38.25,39 38.25,35 45.5,27.75 v1(45.5,26)
NetC14_2: C14.2 C15.1 R22.1 U3.3 | length 5.6
  Top Layer w0.254: R22.1 C15.1 C14.2 ; C14.2@30.211,33.219 C14.2 31.326,33.45 U3.3
NetC25_2: C25.2 C26.2 C27.2 R32.2 U6.6 U7.2 U7.5 | length 13.7
  Top Layer w0.254: C25.2@4.39,27.09 4.39,23.444 C27.2 4.746,23.087 R32.2 5.765,21.73 6.185,21.31 U6.6 ; C25.2 5.6,27.09 U7.5@5.765,26.925 ; U7.5@5.88,27.69 5.88,28.115 8.395,30.63 U7.2
NetC28_2: C28.2 C29.2 R33.1 U6.4 | length 7.6
  Top Layer w0.254: U6.4 8.12,22.53 9.216,23.626 R33.1 10.993,22.778 C29.2
NetFL1_1: FL1.1 FL2.1 | length 2.4
  Top Layer w0.5: FL1.1 FL2.1
NetFL3_1: FL3.1 FL4.1 | length 2.4
  Top Layer w0.5: FL3.1 3.14,11.395 FL4.1
NetP3_1: P3.1 R2.1 | length 2.5
  Top Layer w0.254: R2.1@38.975,45.321 39.25,45.596 39.25,47.377 P3.1
NetP3_2: P3.2 R3.1 U2.3 | length 22.5
  Top Layer w0.254: U2.3 39.545,30.91 40.125,31.49 R3.1 40.373,35.623 v1(41.25,36.5)
  Bottom Layer w0.254: P3.2 36.487,45.263 40.25,41.5 40.25,37.25 41,36.5 v1(41.25,36.5)
NetP4_1: P4.1 R25.1 | length 2.3
  Top Layer w0.254: R25.1 48.04,45.361 P4.1
NetP4_2: P4.2 R31.2 | length 2.3
  Top Layer w0.254: R31.2 45.5,45.371 P4.2
NetP4_3: P4.3 U4.1 | length 51.1
  Top Layer w0.3: v1(34.5,43) 37,45.5 v1@37.5,45.5 ; v1@37.25,45.25 v1@37.5,45.5 ; v1(37.75,45.5) v1@37.5,45.5
  Bottom Layer w0.3: U4.1 17.86,39.11 21.75,43 v1(34.5,43) ; v1(37.75,45.5) 41.5,45.5 42.96,46.96 P4.3
NetP5_1: P5.1 R31.1 | length 22.6
  Top Layer w0.3: v1(45,42.75) 45.45,43.2 R31.1
  Bottom Layer w0.3: P5.1 30.015,48.015 31,49 43.5,49 44.25,48.25 44.25,43.5 v1(45,42.75)
NetP5_2: P5.2 U5.3 | length 66.1
  Bottom Layer w0.254: U5.3 15.755,6.005 15,5.25 10.5,5.25 7.825,7.925 7.825,38 10.5,40.675 10.5,42 16.75,48.25 22.25,48.25 23.25,47.25 24,46.5 26.75,46.5 27.475,47.225 P5.2
NetR4_1: R4.1 R12.2 U1.6 | length 6.5
  Top Layer w0.254: R4.1@42,8.108 42.19,8.298 R12.2 42.19,10.81 41.765,11.235 41.765,12.545 42.155,12.935 U1.6
NetR5_2: R5.2 R6.1 | length 61.9
  Top Layer w0.3: R5.2 20.75,47.615 21.615,46.75 v1(22.25,46.75) ; v1(33.25,16) 34.377,14.873 R6.1
  Bottom Layer w0.3: v1(22.25,46.75) 22.25,46.5 23.75,45 35.25,45 39.25,41 39.25,35.5 47.5,27.25 47.5,23.25 41,16.75 34,16.75 v1(33.25,16)
NetR6_2: R6.2 U1.3 | length 3.7
  Top Layer w0.254: R6.2@35.635,14.98 37.68,12.935 U1.3
NetR7_1: R7.1 R10.2 U2.7 | length 4.8
  Top Layer w0.254: R10.2 38.325,21.289 R7.1 38.325,22.34 39.045,23.06 U2.7
NetR11_2: R11.2 R12.1 U1.2 | length 9.7
  Top Layer w0.254: U1.2 40.005,14.205 ; R11.2 40.31,14.51 40.005,14.205 ; R12.1@40.865,9.802 40.865,13.345 40.005,14.205
NetR13_1: R13.1 R16.2 U2.9 | length 6.2
  Top Layer w0.254: R13.1 40.911,22.735 40.295,22.735 40.045,22.985 U2.9 40.045,24.535 40.495,24.985 40.82,24.985 41.13,25.295 R16.2
NetR14_1: R14.1 R15.1 U2.5 | length 4.5
  Top Layer w0.254: R14.1 35.585,28.045 36.93,26.7 R15.1 37.147,26.7 U2.5
NetR16_1: R16.1 R19.2 U2.1 | length 4.8
  Top Layer w0.254: U2.1 40.545,27.61 41.48,26.675 R16.1 42.479,26.675 R19.2
NetR18_2: R18.2 R20.2 U2.4 | length 5.4
  Top Layer w0.254: R18.2 38.81,30.38 R20.2 39.045,29.505 U2.4
NetR23_2: R23.2 R25.2 | length 44
  Top Layer w0.3: R23.2 10.687,45.75 27.75,45.75 33.5,40 44.059,40 R25.2
NetR24_1: R24.1 R26.2 U5.1 | length 3.2
  Bottom Layer w0.254: R26.2 16.329,9.56 ; U5.1 16.329,9.56 ; R24.1 16.329,9.56
NetR26_1: R26.1 R30.2 U5.4 | length 6.4
  Bottom Layer w0.254: R30.2 R26.1 15.11,8.245 15.11,7.174 U5.4
NetR27_1: R27.1 U4.4 | length 2.5
  Bottom Layer w0.254: U4.4 18.555,15.445 18.795,15.205 R27.1
NetR28_1: R28.1 U4.5 | length 1.8
  Bottom Layer w0.254: R28.1@13.426,15.37 13.501,15.445 U4.5
NetR32_1: R32.1 U6.5 | length 1.8
  Top Layer w0.254: R32.1 7.18,23.052 U6.5
NetR34_2: R34.2 U7.3 | length 2.4
  Top Layer w0.254: U7.3 7.125,33.315 R34.2
NetR35_2: R35.2 U7.6 | length 2.2
  Top Layer w0.254: R35.2@7.045,24.875 7.125,24.955 U7.6
ON_OFF_DC: P1.7 P2.8
PIT_VG: P2.7 P3.3 | length 55.2
  Bottom Layer w0.254: 31.5,6.5 31.5,9 38.75,16.25 41.25,16.25 48,23 48,27.5 39.75,35.75 39.75,41.25 33.947,47.052 P3.3
POT_CLK: P1.8 R27.2 | length 1.7
  Bottom Layer w0.254: v1(18,11) 18.795,11.795 R27.2
POT_SDI: P1.9 R28.2 | length 1.5
  Bottom Layer w0.254: v1(12,14) 12.046,14.046 R28.2
R_VG: R2.2 R24.2 | length 60
  Top Layer w0.254: v1(37.75,41) 38,41 39.25,42.25 39.25,43.666 R2.2@38.975,43.941
  Bottom Layer w0.254: R24.2 18.309,9.75 20.192,11.633 27.133,11.633 32.75,17.25 40.75,17.25 47,23.5 47,27 38.75,35.25 38.75,40.25 38,41 v1(37.75,41)
RT1: D1.5 P1.6 pad.10@31.34,2.078 | length 21.8
  Top Layer w0.254: D1.5 29.87,22.495 29.15,21.775 29.15,14.825 31.34,12.635 pad.10@31.34,2.078
RT2: D1.4 P1.5 pad.9@28.8,2.078 | length 23.7
  Top Layer w0.254: pad.9@28.8,2.078 28.525,2.353 28.525,23.49 D1.4
SIGNAL: P2.10 pad.12@36.42,2.078 R11.1 R13.2 R17.2 | length 36.8
  Top Layer w0.254: pad.12@36.5,2.75 36.5,3.75 33,7.25 33,12.05 30,15.05 30,17.75 31,18.75 32.25,18.75 34.5,16.5 39,16.5 39.25,16.75 39.25,18 39.75,18.5 41.75,18.5 41.846,18.596 ; R13.2 41.846,18.596 ; R17.2 41.993,17.509 41.846,17.656 41.846,18.596
SIGNAL_OUT: P2.11 pad.13@38.96,2.078 R4.2 | length 6.3
  Top Layer w0.254: pad.13@39,2.5 39,4.75 40.25,6 41.522,6 R4.2
SPEED_VG: P2.14 P5.3 | length 56.6
  Bottom Layer w0.254: 9.25,5.75 7.35,7.65 7.35,38.25 10,40.9 10,42.5 16.25,48.75 22.5,48.75 23.65,47.6 P5.3
TEC+: D1.9 P1.1 P1.2 pad.3@23.72,2.078 | length 11.1
  Top Layer w0.5: 22.45,6.325 D1.9
TEC-: D1.7 P1.3 P1.4 pad.2@26.26,2.078 | length 11
  Top Layer w0.5: 27.53,6.38 D1.7
VG_CS: P1.10 R29.2 U4.6 | length 5.4
  Bottom Layer w0.254: v1(14,14) 14.395,13.605 R29.2 15.72,14.03 16.185,14.495 16.185,15.695 15.785,16.095 U4.6
pads on no net: D1.1 D1.3 D1.8 D1.10 D1.11 P1.13 P1.14 U1.1 U1.5 U1.8 U3.5 U6.3

## Polygon pours and split planes (outlines as drawn)
+5V(AN) on Inner 1 "Top Layer-No Net" (solid, pour order 0): 0.5,49.5 49.5,49.5 49.5,0.5 0.5,0.5
GND on Inner 2 "Top Layer-No Net" (solid, pour order 2): 0.5,49.5 49.5,49.5 49.5,0.5 0.5,0.5
GND on Top Layer "Top Layer-No Net" (solid, pour order 4): 0.5,0.5 0.5,49.5 49.5,49.5 49.5,0.5 0.5,0.5
GND on Bottom Layer "Bottom Layer-No Net" (solid, pour order 6): 0.5,0.5 0.5,49.5 49.5,49.5 49.5,0.5

## Silkscreen, mask and mechanical layers (free items; w line width, h text height)
Top Solder:
  lines w2: 16,4 16,22.5 18.535,25.035 19.91,25.035
Mechanical 1:
  lines w0.254: 24.99,-0.005 24.99,22.495 ; -0.01,-0.005 -0.01,49.995 49.99,49.995 49.99,-0.005 -0.01,-0.005